# Altium PCB GND_REVB.PcbDoc
Units mm, origin at the board's own origin, x right, y up, seen from the top; angles counter-clockwise.
Board outline 100 x 100 mm, 2 copper layers (Top Layer, Bottom Layer); 25 components, 30 nets, 143 pads, 23 vias.
Unrouted connection lines stored in the file: 3.
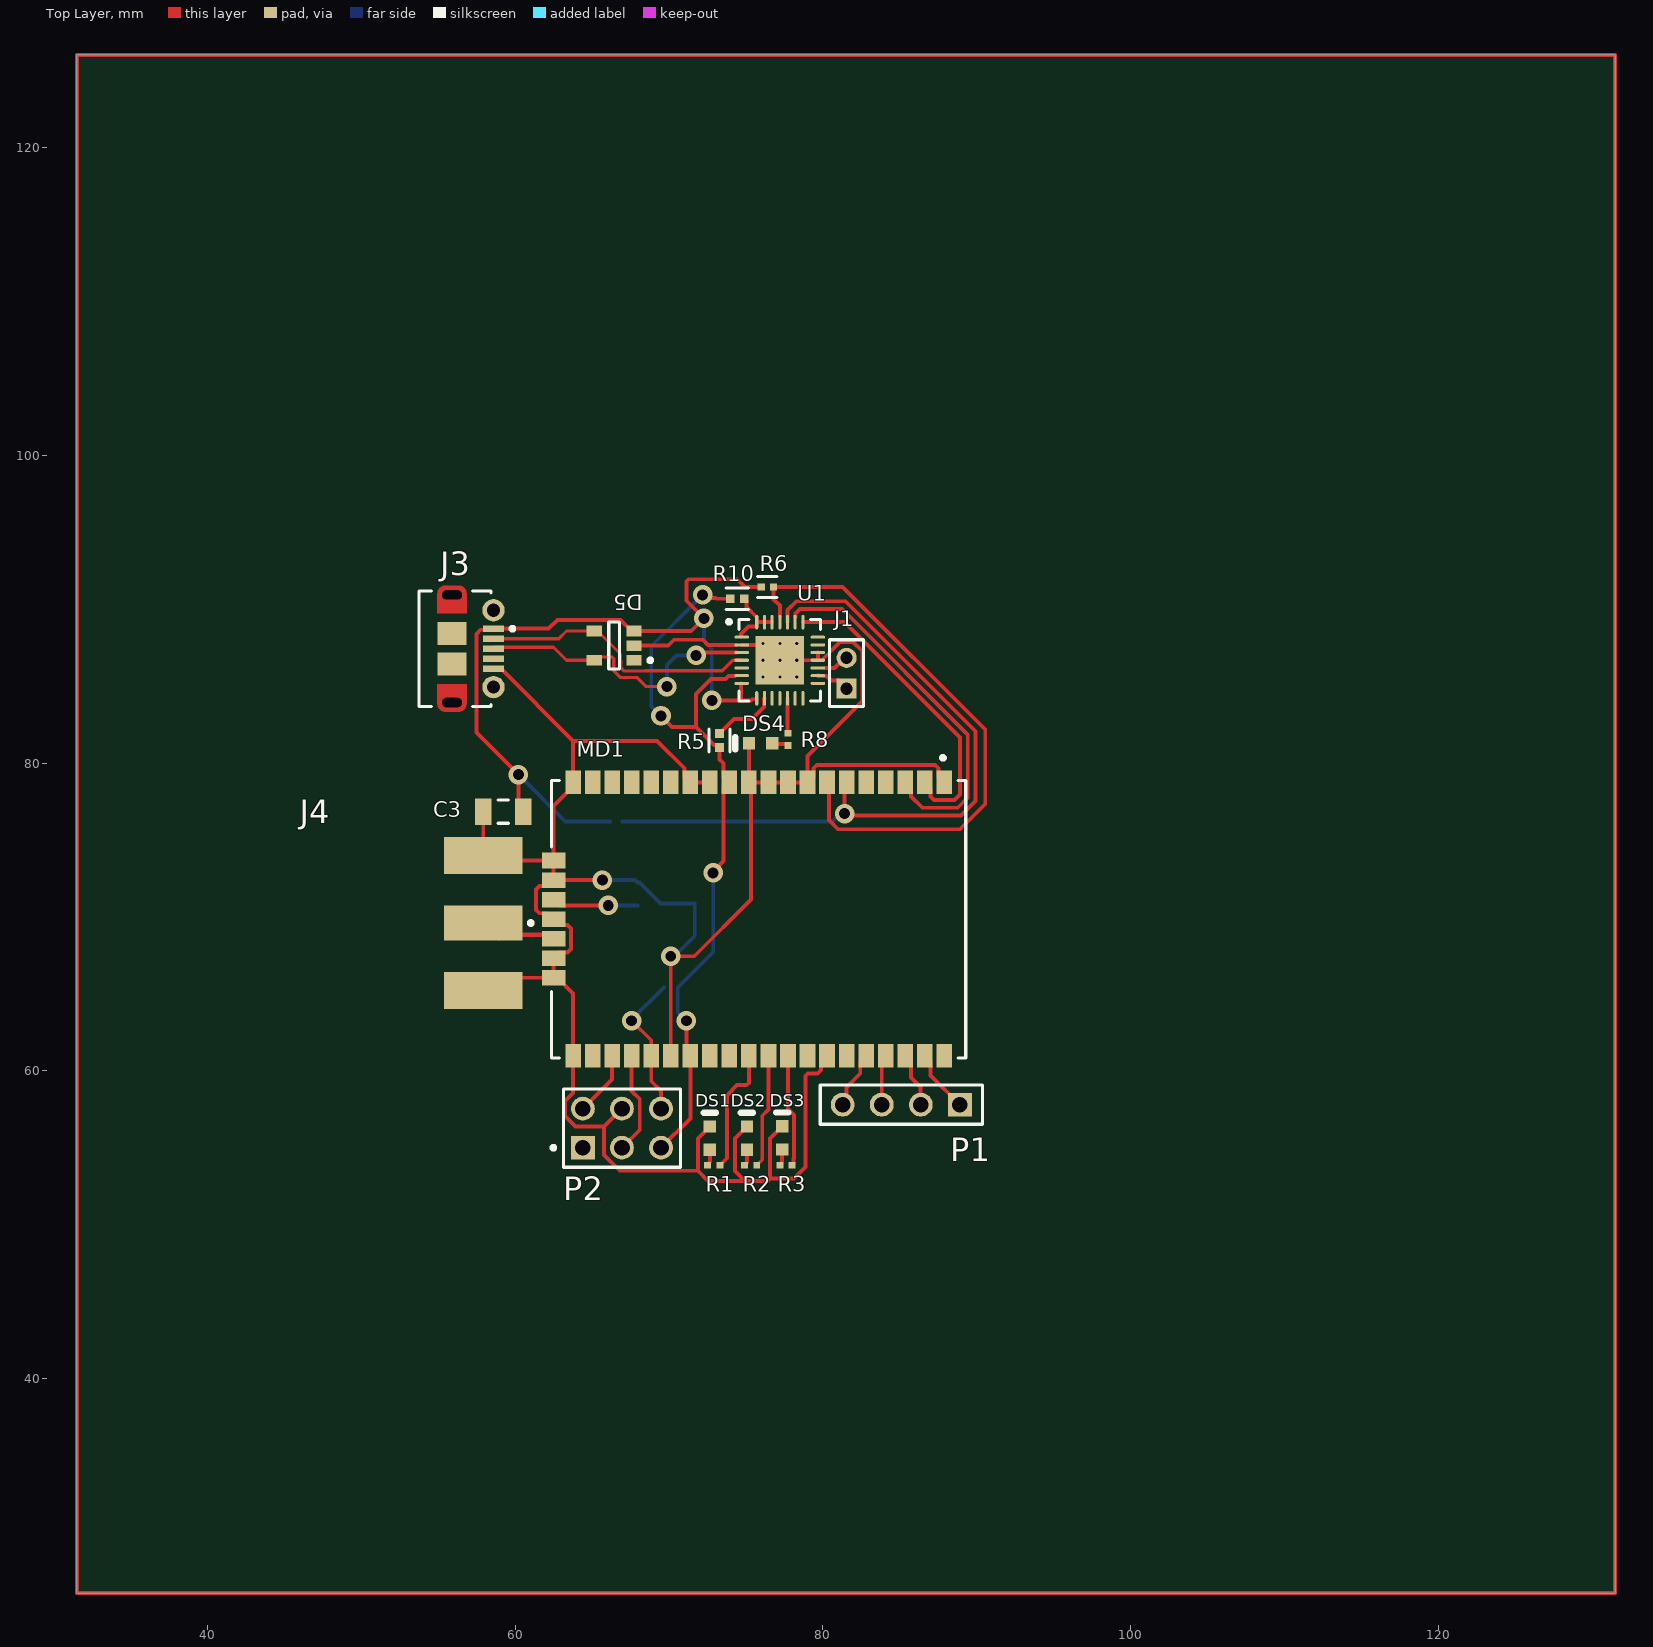
[diagram p0: Top Layer view]
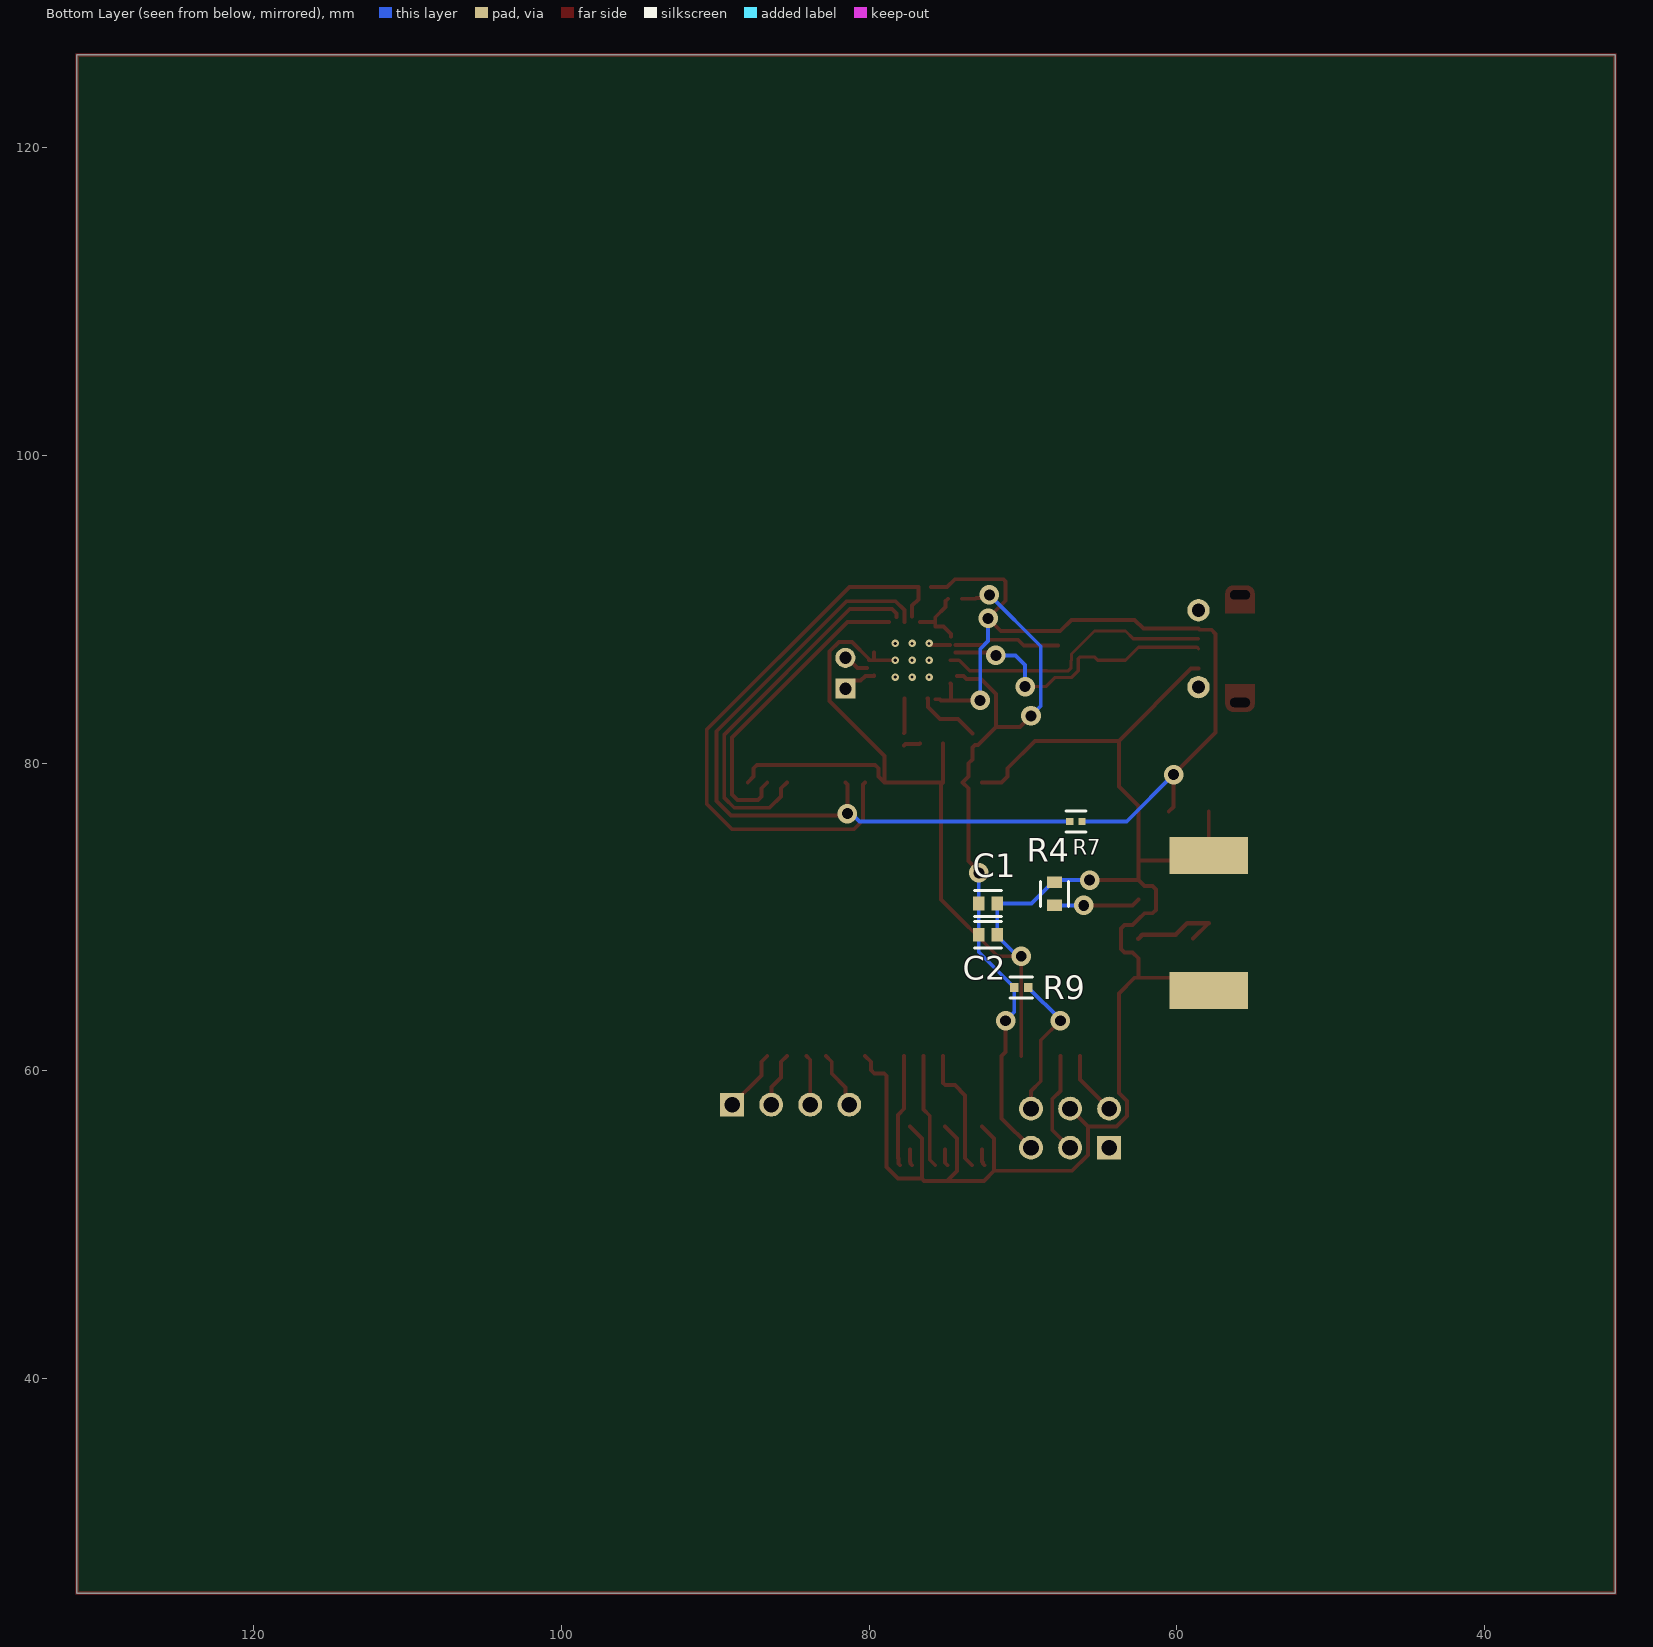
[diagram p1: Bottom Layer view, seen from below]
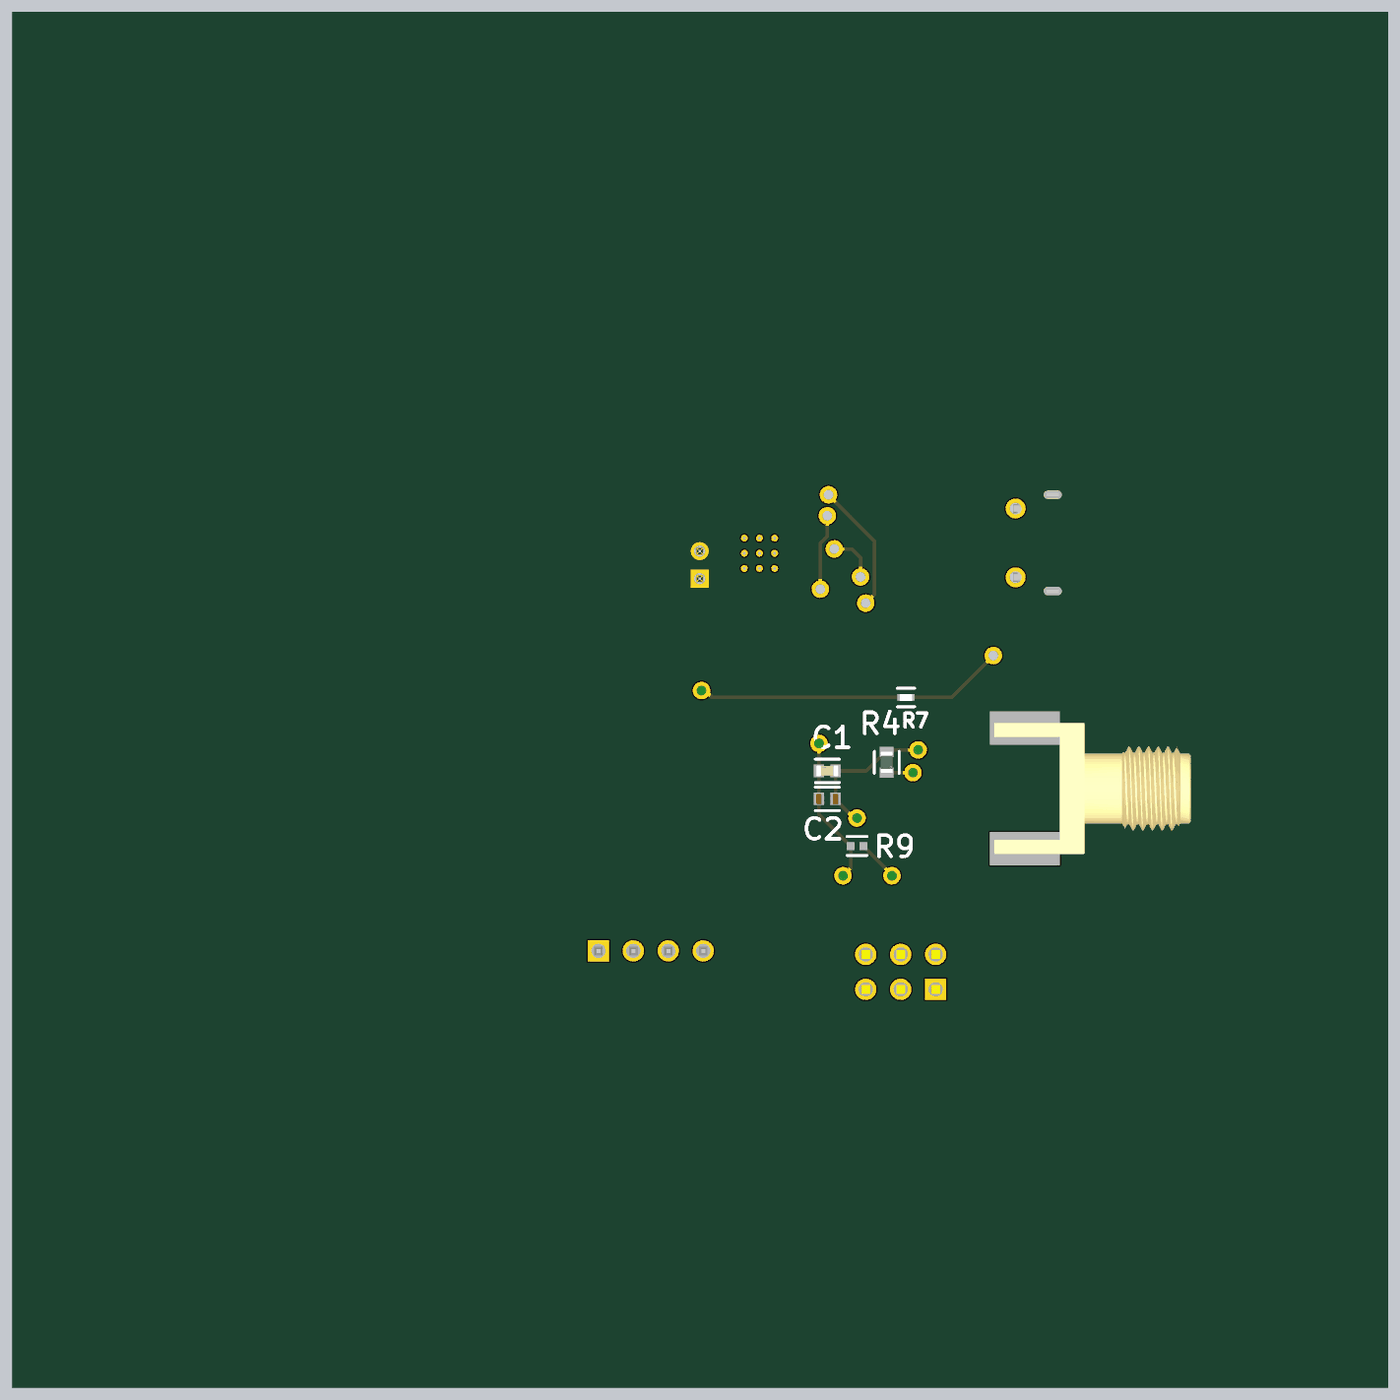
[diagram p2: 3D render of the assembled board from below, using the file's embedded part models]

## Layer stack, top to bottom
Top Solder: solder mask 0.0102, Solder Resist, Dk 3.5
Top Layer: signal copper 0.018
Dielectric 1: dielectric 0.32, FR-4, Dk 4.8
Bottom Layer: signal copper 0.018
Bottom Solder: solder mask 0.0102, Solder Resist, Dk 3.5

## Board outline
31.496,26.035 31.496,126.035 131.496,126.035 131.496,26.035

## Design rules (kind name [scope] priority, off if disabled: settings)
Clearance [All] p1: gap=0.254 ignorepadtopadclearanceinfootprint=TRUE except(0: Arc-Hole Track-Hole SMDPad-Hole THPad-Hole Via-Hole Fill-Hole Poly-Hole Region-Hole Text-Hole; 0.127: Arc-Arc Arc-Track Track-Track SMDPad-SMDPad THPad-THPad)
DiffPairsRouting [All] p1: maxlimit=0.254 minlimit=0.127 mostfreqgap=0.127 toplayer_minwidth=0.206 toplayer_maxwidth=0.206 toplayer_prefwidth=0.206 bottomlayer_minwidth=0.206 bottomlayer_maxwidth=0.206 bottomlayer_prefwidth=0.206 maxuncoupledlength=12.7
PlaneConnect [All] p1: pad.planeconnectstyle=Relief pad.reliefexpansion=0.508 pad.reliefentries=4 pad.reliefconductorwidth=0.254 pad.reliefairgap=0.254 via.planeconnectstyle=Direct via.reliefexpansion=0.508 via.reliefentries=4 via.reliefconductorwidth=0.254 via.reliefairgap=0.254
PolygonConnect [All] p1: connectstyle=Relief reliefconductorwidth=0.254 reliefentries=4 polygonreliefangle="90 Angle" airgapwidth=0.254
RoutingVias [All] p1: holewidth=0.254 width=0.445 viastyle="Through Hole" minholewidth=0.2 minwidth=0.4 maxholewidth=6.3 maxwidth=6.4
SolderMaskExpansion [All] p1: expansion=0.102 istentingtop=FALSE
Width [All] p1: maxlimit=2.5 minlimit=0.127 preferedwidth=0.293 minimp=50.000000 maximp=50.000000 favimp=50.000000
28 further rules are at their usual default settings.

## Classes and differential pairs
component class USBPort: C3 D5 J3
component class USB_UART: C1 C2 DS4 J1 R5 R6 R7 R8 R10 U1
component class RN2483: DS1 DS2 DS3 MD1 P1 P2 R1 R2 R3 R4 R9
component class RadioSignalBlocker: J4
differential pair USB_DATA: +D+ -D-
differential pair NewDifferentialPair1: +D+ -D-

## Components (designator, comment, footprint, x,y, rotation, side; value= is the part's Value field where it differs from the comment)
C1 "C0603C104K5RACTU" FP-C0603C-CF-MFG 72.263,70.866 r180 bottom value="0.10 μF"
C2 "C0603C475K9PACTU" FP-C0603-CG-MFG 72.263,68.834 r180 bottom value=4.7uF
C3 "C1206C105K5RACTU" CAPC3216X110X50LL20T25 59.212,76.835 r0 top
D5 "SP0504BAHTG" FP-SP0504BAHTG-MFG 66.421,87.63 r180 top value=30pF
DS1 "HSMY-C190" AVAG-HSMX-C190_V 72.644,55.614 r90 top
DS2 "HSMH-C190" AVAG-HSMX-C190_V 75.057,55.614 r90 top
DS3 "HSMG-C190" AVAG-HSMX-C190_V 77.343,55.626 r90 top
DS4 "HSMH-C190" AVAG-HSMX-C190_V 75.946,81.28 r180 top
J1 "M22-2510205" FP-M22-2510205-MFG 81.534,85.836 r90 top
J3 "105017-0001" USB-MICRO-B_V 57.23,87.432 r270 top
J4 "142-0701-801" CINC-142-0701-801_V 57.912,69.596 r180 top
MD1 "RN2483A-I/RM104" FP-RN2483A-I-RM104-MFG 75.819,69.85 r90 top
P1 "TSW-104-08-G-S" SMTC-TSW-104-08-X-S 88.9,57.785 r180 top
P2 "TSW-103-07-G-D" SMTC-TSW-103-07-G-D_V 66.929,56.261 r0 top
R1 "CRCW0402220KFKED" RESC1005X40X25LL05T05 72.898,53.848 r0 top
R2 "CRCW0402220KFKED" RESC1005X40X25LL05T05 75.292,53.848 r0 top
R3 "CRCW0402220KFKED" RESC1005X40X25LL05T05 77.597,53.848 r0 top
R4 "CRCW060350R0FKEA" FP-CRCW0603-e3-MFG 67.945,71.489 r270 bottom
R5 "CRCW040210K0FKED" FP-CRCW0402-e3-IPC_B 73.279,81.463 r270 top
R6 "CRCW0402100KFKED" FP-CRCW0402-e3-IPC_C 76.383,91.44 r180 top
R7 "CRCW0402100KFKED" FP-CRCW0402-e3-IPC_C 66.548,76.2 r180 bottom
R8 "CRCW0402220KFKED" RESC1005X40X25LL05T05 77.724,81.534 r90 top
R9 "CRCW040210K0FKED" FP-CRCW0402-e3-IPC_B 70.104,65.405 r0 bottom
R10 "CRCW040210K0FKED" FP-CRCW0402-e3-IPC_B 74.422,90.678 r0 top
U1 "CP2103-GM" SLAB-QFN-28-3125x3125TP_A_M 77.192,86.679 r0 top

## Footprints (in the part's own frame and the unit in brackets; to place one, negate y for a bottom-side part, rotate by r counter-clockwise, add the part's x,y. Pads: shape width x height; smd on the part's side, far side on the other; paste and mask are expansions set on the pad)
AVAG-HSMX-C190_V [mm] "SMD, 2-Leads, Body 1.6x0.8mm, Height 0.9mm"
  rect 0.8x0.8 smd: 1(-0.75,0) 2(0.75,0)
  silkscreen extent 1.65,-0.4 1.65,0.4, body extent -0.8,-0.4 0.8,0.4, height 0.9
CAPC3216X110X50LL20T25 [mm] "Chip Capacitor, 2-Leads, Body 3.20x1.60mm, IPC High Density"
  rect 1.1x1.7 smd: 1(-1.3,0) 2(1.3,0)
  silkscreen extent -0.35,-0.75 0.35,0.75, body extent -1.7,-0.9 1.7,0.9, height 1.1
CINC-142-0701-801_V [mil] "SMA Connector, 5-Leads, Body 14.275x9.525mm"
  rect 200x90 smd: 1(0,0)
  rect 200x95 smd: 2(0,172.5) 3(0,-172.5)
  rect 200x95 smd far side: 4(0,172.5)
  rect 200x95 smd far side mask+4: 5(0,-172.5)
  silkscreen extent -127,-5 -117,5, body extent -87,-187 475,188, height 171
FP-C0603-CG-MFG [mm]
  rect 0.75x0.9 smd paste+0 mask+0: 1(-0.6,0) 2(0.6,0)
  silkscreen extent -0.87,-0.85 0.87,0.85, body extent -0.8,-0.4 0.8,0.4, height 0.9
FP-C0603C-CF-MFG [mm]
  rect 0.75x0.9 smd paste+0 mask+0: 1(-0.6,0) 2(0.6,0)
  silkscreen extent -0.87,-0.85 0.88,0.85, body extent -0.8,-0.4 0.8,0.4, height 0.87
FP-CRCW0402-e3-IPC_B [mm]
  rect 0.568x0.572 smd paste+0 mask+0: 1(-0.452,0) 2(0.452,0)
  silkscreen extent -0.74,-0.69 0.74,0.69
FP-CRCW0402-e3-IPC_C [mm]
  rect 0.468x0.472 smd paste+0 mask+0: 1(-0.402,0) 2(0.402,0)
  silkscreen extent -0.64,-0.67 0.64,0.67, body extent -0.74,-0.38 0.74,0.38, height 0.25
FP-CRCW0603-e3-MFG [mm]
  rect 0.75x1 smd paste+0 mask+0: 1(-0.75,0) 2(0.75,0)
  silkscreen extent -0.8,-0.9 0.8,0.9, body extent -0.77,-0.43 0.77,0.43, height 0.5
FP-M22-2510205-MFG [mm]
  rect 1.3x1.3 hole 0.8 paste-1000 mask+0: 1(-1,0)
  round 1.3 hole 0.8 paste-1000 mask+0: 2(1,0)
  silkscreen extent -2.18,-1.1 2.18,1.1, body extent -2.27,-1.2 2.27,1.2, height 0.25
FP-RN2483A-I-RM104-MFG [mil]
  rect 60x40 smd paste+0 mask+0: 1(350,-475) 2(350,-425) 3(350,-375) 4(350,-325) 5(350,-275) 6(350,-225) 7(350,-175) 8(350,-125) 9(350,-75) 10(350,-25) 11(350,25) 12(350,75) 13(350,125) 14(350,175) 15(350,225) 16(350,275) 17(350,325) 18(350,375) 19(350,425) 20(350,475) 28(-350,475) 29(-350,425) 30(-350,375) 31(-350,325) 32(-350,275) 33(-350,225) 34(-350,175) 35(-350,125) 36(-350,75) 37(-350,25) 38(-350,-25) 39(-350,-75) 40(-350,-125) 41(-350,-175) 42(-350,-225) 43(-350,-275) 44(-350,-325) 45(-350,-375) 46(-350,-425) 47(-350,-475)
  rect 40x60 smd paste+0 mask+0: 21(150,525) 22(100,525) 23(50,525) 24(0,525) 25(-50,525) 26(-100,525) 27(-150,525)
  silkscreen extent -355,-530 418,530, body extent -384,-534 384,559, height 10
FP-SP0504BAHTG-MFG [mm]
  rect 0.99x0.69 smd paste+0 mask+0: 1(-1.295,0.95) 2(-1.295,0) 3(-1.295,-0.95) 4(1.295,-0.95) 5(1.295,0.95)
  silkscreen extent -2.48,-1.53 0.35,1.53, body extent -1.89,-1.63 1.89,1.63, height 0.25
RESC1005X40X25LL05T05 [mm] "Chip Resistor, 2-Leads, Body 1.00x0.50mm, IPC High Density"
  rect 0.45x0.45 smd: 1(-0.4,0) 2(0.4,0)
  body extent -0.53,-0.27 0.53,0.28, height 0.4
SLAB-QFN-28-3125x3125TP_A_M [mm] "QFN, 28-Leads, Body 5x5mm, Pitch 0.5mm, Thermal Pad 3.13x3.13mm, IPC Low Density"
  oval 0.95x0.2 smd: 1(-2.475,1.5) 2(-2.475,1) 3(-2.475,0.5) 4(-2.475,0) 5(-2.475,-0.5) 6(-2.475,-1) 7(-2.475,-1.5) 15(2.475,-1.5) 16(2.475,-1) 17(2.475,-0.5) 18(2.475,0) 19(2.475,0.5) 20(2.475,1) 21(2.475,1.5)
  oval 0.2x0.95 smd: 8(-1.5,-2.475) 9(-1,-2.475) 10(-0.5,-2.475) 11(0,-2.475) 12(0.5,-2.475) 13(1,-2.475) 14(1.5,-2.475) 22(1.5,2.475) 23(1,2.475) 24(0.5,2.475) 25(0,2.475) 26(-0.5,2.475) 27(-1,2.475) 28(-1.5,2.475)
  rect 3.13x3.13 smd: 29(0,0)
  silkscreen extent -3.42,-2.65 2.65,2.65, body extent -2.5,-2.5 2.5,2.5, height 1
SMTC-TSW-103-07-G-D_V [mm] "THD, 6-Leads, Body 7.62x5.08mm, Pitch 2.54mm"
  rect 1.55x1.55 hole 1.02: 1(-2.54,-1.27)
  round 1.55 hole 1.02: 2(-2.54,1.27) 3(0,-1.27) 4(0,1.27) 5(2.54,-1.27) 6(2.54,1.27)
  silkscreen extent -4.58,-2.54 3.81,2.54, body extent -3.81,-2.54 3.81,2.54, height 8.38
SMTC-TSW-104-08-X-S [mm] ".025 SQ Post Terminal Strip Assembly, 1x4 Pins, Vertical, 2.54mm Pitch, Male"
  rect 1.55x1.55 hole 1.02: 1(0,0)
  round 1.55 hole 1.02: 2(2.54,0) 3(5.08,0) 4(7.62,0)
  silkscreen extent -1.46,-1.27 9.08,1.27, body extent -1.27,-1.27 8.89,1.27, height 8.38
USB-MICRO-B_V [mm] "USB, MICRO B, Body 7.491x4.695 mm, Pitch 0.65 mm"
  rect 0.4x1.35 smd: 1(-1.3,1.35) 2(-0.65,1.35) 3(0,1.35) 4(0.65,1.35) 5(1.3,1.35)
  round 1.45 hole 0.85: 6(-2.5,1.35) 7(2.5,1.35)
  rrect50% 0x0 hole 0.6 slot 1.3 at 90 deg: 8(-3.5,-1.35) 11(3.5,-1.35)
  rect 1.5x1.9 smd: 9(-1,-1.35) 10(1,-1.35)
  Top Layer circle w0.5: c-3.6,-1.8 r0.25
  Top Layer circle w0.5: c-3.6,-0.9 r0.25
  Top Layer circle w0.5: c3.6,-1.8 r0.25
  Top Layer circle w0.5: c3.6,-0.9 r0.25
  Top Layer region: -3.6,-1.8 -3.6,-0.9 -4.1,-0.9 -4.1,-1.8
  Top Layer region: 3.6,-0.9 3.6,-1.8 4.1,-1.8 4.1,-0.9
  Top Layer region: 2.3,-0.4 2.3,-2.3 3.6,-2.3 3.6,-0.4
  Top Layer region: -2.3,-2.3 -2.3,-0.4 -3.6,-0.4 -3.6,-2.3
  silkscreen extent -3.75,-3.5 3.75,2.7, body extent -4.1,-3.9 4.1,1.5, height 2.67

## Part data
C1: library part CMP-2006-03061-2, "CAP CER 0.1UF 50V X7R 0603", Capacitance="0.10 μF", Manufacturer=KEMET, Package=C0603C-CF, Temperature="-55°C to +125°C", Temperature Characteristic=X7R, Temperature Coefficient=30ppm/°C, Temperature Range High=+125°C, Temperature Range Low=-55°C, Tolerance=0.1, Voltage Rating="50 V", Automotive=Yes, Automotive Grade="Grade 1", Category=Cap, ComponentLink2Description=Datasheet, ComponentLink2URL=https://api.kemet.com/component-edge/download/datasheet/C0603C100J5GACAUTO.pdf, Device Class L1="Passive Components", Device Class L2=Capacitors, Device Class L3="Ceramic Capacitors", Digikey Description="CAP CER 0.1UF 50V X7R 0603", Height=0.87mm, Lead Free=Yes, Manufacturer Part Number=C0603C104K5RACTU, Material=Ceramic, Octopart=https://octopart.com/c0603c104k5ractu-kemet-139244, RoHS=TRUE
C2: library part CMP-2006-02256-2, "CAP CER 4.7UF 6.3V X5R 0603", Capacitance=4.7uF, Manufacturer=Kemet, Package=C0603-CG, Temperature="-55°C to +85°C", Temperature Characteristic=X5R, Temperature Coefficient=15%, Temperature Range High=+85°C, Temperature Range Low=-55°C, Tolerance=10%, Voltage Rating=6.3V, Automotive=No, Category=Cap, ComponentLink2Description=Datasheet, ComponentLink2URL=https://content.kemet.com/datasheets/KEM_C1006_X5R_SMD.pdf, Device Class L1="Passive Components", Device Class L2=Capacitors, Device Class L3="Ceramic Capacitors", Digikey Description="CAP CER 4.7UF 6.3V X5R 0603", Height=0.9mm, Ipc Land Pattern Name=CAPC16080X80, Lead Free=Yes, Manufacturer Part Number=C0603C475K9PACTU, Material=Ceramic, Mouser Description="Multilayer Ceramic Capacitors MLCC - SMD/SMT 6.3volts 4.7uF X5R 10%", Octopart=https://octopart.com/c0603c475k9pactu-kemet-104242, RoHS=TRUE
C3: library part CMP-2000-06011-1, "Chip Capacitor, 1 uF, +/- 10%, 50 V, -55 to 125 degC, 1206 (3216 Metric), RoHS, Tape and Reel", Capacitance=1uF, Capacitance - nF=1000nF, Case Code - in=1206, Case Code - mm=3216, Case Height=1mm, Case Length=3.2mm, Case Width=1.6mm, Dielectric=X7R, Manufacturer=Kemet, Maximum Operating Temperature=+125C, Minimum Operating Temperature=-55C, Operating Temperature Range=-55Cto+125C, Package / Case=1206(3216metric), Package Description="2-Pin Surface Mount Device, Body 3.2 x 1.6 mm", Temperature Coefficient / Code=+/-15%, Tolerance=10%, Voltage Rating=50V, Brand=Kemet, Class=Class1, Datasheet URL=http://www.kemet.com/docfinder?Partnumber=C1206C105K5RACTU, Datasheet Version=02/2016, Dimensions=1.6mmWx3.2mmLx1mmH, Factory Pack Quantity=2500, Manufacturer URL=http://www.kemet.com/, Mounting Technology=SurfaceMount, Package Reference=1206, Packaging=Reel, Product=GeneralTypeMLCCs, Product Category=MultilayerCeramicCapacitorsMLCC-SMD/SMT, RoHS=Details, Series=C1206C, Termination Style=SMD/SMT, Type=SMDMLCCX7R6.3-250VDCCommericalGrade, Voltage Rating DC=50V
D5: library part CMP-08607-000010-1, "TVS DIODE 5.5V 8.5V SOT23-5", Capacitance=30pF, Clamping Voltage=8.5V, Manufacturer=Littelfuse, Reverse Standoff Voltage=5.5V, Temperature="-40°C to +125°C", Temperature Range High=+125°C, Temperature Range Low=-40°C, Automotive=No, Category=Diode, ComponentLink2Description=Datasheet, ComponentLink2URL=https://www.littelfuse.com/~/media/electronics/datasheets/tvs_diode_arrays/littelfuse_tvs_diode_array_sp05_datasheet.pdf.pdf, Device Class L1="Circuit Protection", Device Class L2="TVS Diodes", Device Class L3=unset, Digikey Description="TVS DIODE 5.5V 8.5V SOT23-5", Direction=Unidirectional, Height=1.45mm, Lead Free=Yes, Manufacturer Part Number=SP0504BAHTG, Mouser Description="TVS Diodes / ESD Suppressors SP0504BAHTG", Number Of Channels=4, Octopart=https://octopart.com/sp0504bahtg-littelfuse-587259, Package=SP0504BAHTG, RoHS=TRUE, Standoff Height=0mm
DS1: library part CMP-1744-00003-1, "LED Uni-Color Yellow, 65 mW, 20 mA, -40 to 85 degC, 2-Pin SMD, RoHS, Tape and Reel", Case Code (Imperial)=0603, Case Code (Metric)=1608, Max Operating Temperature="155 degC", Min Operating Temperature="-55 degC", Package Quantity=5000, Power Rating="100 mW", Resistance="390 Ohm", Tolerance=1%, Voltage Rating="50 V", Case\Package=0603, ComponentLink1Description="Manufacturer URL", ComponentLink1URL=http://www.avagotech.com/, ComponentLink2Description=Datasheet, ComponentLink2URL=http://docs.avagotech.com/docs/AV02-0551EN, ComponentLink3Description="Package Specification", ComponentLink3URL=http://www.fairchildsemi.com/dwg/MA/MA03D.pdf, DatasheetVersion=Mar-12, Height="0.45 mm", Length="1.6 mm", Mount="Surface Mount", PackageDescription="2-Pin Surface Mount Device, Body 1.6 x 0.8 mm, Height 0.9 mm", PackageReference=HSMX-C190, Packaging="Tape and Reel", Pins=2, REACH SVHC="No SVHC", RoHSCompliant=true, Voltage Rating (DC)="50 V", Width="0.8 mm"
DS2 DS4: library part CMP-1744-00004-1, "LED Uni-Color Red, 65 mW, 20 mA, -40 to 85 degC, 2-Pin SMD, RoHS, Tape and Reel", Current Rating="1 A", Max Operating Temperature="85 degC", Min Operating Temperature="-30 degC", Package Quantity=2000, ComponentLink1Description="Manufacturer URL", ComponentLink1URL=http://www.avagotech.com/, ComponentLink2Description=Datasheet, ComponentLink2URL=http://docs.avagotech.com/docs/AV02-0551EN, ComponentLink3Description="Package Specification", ComponentLink3URL=http://www.fairchildsemi.com/dwg/MA/MA03D.pdf, Connector Type=USB, Contact Material=Copper, Contact Plating=Gold, DatasheetVersion=Mar-12, Gender=Male, Height="2.8 mm", Lead Pitch="0.65 mm", Length="7.5 mm", Mount="Surface Mount", PackageDescription="2-Pin Surface Mount Device, Body 1.6 x 0.8 mm, Height 0.9 mm", PackageReference=HSMX-C190, Packaging="Tape and Reel", Pins=5, REACH SVHC="No SVHC", RoHSCompliant=true, Width="5.6 mm"
DS3: library part CMP-1744-00002-1, "Chip LED, Green, 2.2 V, -40 to 85 degC, 2-Pin SMD, RoHS, Tape and Reel", Case\Package=SOIC, Clock Frequency="100 KHz", Frequency="400 KHz", Max Operating Temperature="85 degC", Max Supply Voltage="5.5 V", Min Operating Temperature="-40 degC", Min Supply Voltage="1.7 V", Nominal Supply Current="2 mA", Package Quantity=3000, Access Time="3500 ns", ComponentLink1Description="Manufacturer URL", ComponentLink1URL=http://www.avagotech.com/, ComponentLink2Description=Datasheet, ComponentLink2URL=http://docs.avagotech.com/docs/AV02-0551EN, ComponentLink3Description="Package Specification", ComponentLink3URL=http://www.fairchildsemi.com/dwg/MA/MA03D.pdf, DatasheetVersion=Mar-12, Density="32 kb", Height="1.5 mm", Interface=Serial, Length="5 mm", Max Clock Frequency="100 KHz", Mount="Surface Mount", PackageDescription="2-Pin Surface Mount Device, Body 1.6 x 0.8 mm, Height 0.9 mm", PackageReference=HSMX-C190, Packaging="Tape and Reel", Pins=8, Radiation Hardening=No, REACH SVHC="No SVHC", RoHSCompliant=true, Width="4 mm"
J1: library part CMP-15831-000005-1, "CONN HEADER VERT 2POS 2MM", Current Rating=2A, Manufacturer=Harwin, Package=0, Temperature="-40°C to +105°C", Temperature Range High=+105°C, Temperature Range Low=-40°C, Automotive=No, Category=Conn, ComponentLink2Description=Datasheet, ComponentLink2URL=https://cdn.harwin.com/pdfs/C018XX_M22_Series_Connectors.pdf, Conn Gender=Male, Conn Orientation=Vertical, Contact Material=Gold,Nickel, Device Class L1=Connectors, Device Class L2="Headers and Wire Housings", Device Class L3=unset, Digikey Description="CONN HEADER VERT 2POS 2MM", Footprint Url=https://cdn.harwin.com/pdfs/M22-251.pdf, Height=5.45mm, Lead Free=Yes, Manufacturer Part Number=M22-2510205, Mouser Description="Headers & Wire Housings 2 PIN SIL VERTICAL GOLD PIN HEADER", Number Of Contacts=2, Number Of Rows=1, Octopart=https://octopart.com/m22-2510205-harwin-2538221, Pitch=2mm, RoHS=TRUE
J3: library part CMP-2000-05827-1, "Micro-USB B Receptacle, Right Angle, Bottom Mount, Surface Mount, with Solder Tabs, -30 to 85 degC, 5-Pin USB, RoHS, Tape and Reel", Manufacturer=Molex, Package Description="5-Leads USB, Micro B, Body 7.5 x 5 mm, Pitch 0.65 mm", Package Reference=MICRO-B, Package Version="Rev. F, 12/2012", Standard Package=1, Voltage - Max=30V, 3D Model=105017-0001.stp, Catalog Drawings=1050170001, Category=Connectors,Interconnects, Circuits=5, Connector Type=USB-microB, Datasheet URL=http://www.molex.com/elqNow/elqRedir.htm?ref=http://www.molex.com/webdocs/datasheets/pdf/en-us/1050170001_IO_CONNECTORS.pdf, Datasheet Version=03/2016, Family=USB,DVI,HDMIConnectors, Featured Product=Micro-USBConnectorsUSBConnectors, Features=Shielded,SolderRetention, Gender=Receptacle, Ingress Protection=-, Manufacturer URL=http://www.molex.com/, Mating Products=WM17145-ND-CABLEMICROUSBBTOSTDA1.0MWM17147-ND-CABLEMICROUSBBTOSTDA2.0MWM17146-ND-CABLEMICROUSBBTOSTDA1.5M, Mounting Technology=SurfaceMount, Mounting Type=BoardCutout,SurfaceMount,RightAngle, Number Of Contacts=5, Online Catalog=Molex-MicroUSB, Other Names=WM1399DKR, Package URL=http://www.molex.com/pdm_docs/sd/1050170001_sd.pdf, Packaging=Digi-Reel®, PCN Assembly/Origin=ResinSupplier21/Oct/2015, RoHS Information=1050170001CertofCompliance, Series=-, Specifications=-
J4: library part CMP-2000-05490-1, "SMA End Launch Jack Receptacle, 50 Ohm, 0 to 18 GHz, -65 to 165 degC, 5-Pin SMD, RoHS, Bulk", Manufacturer=EmersonConnectivitySolutions, Maximum Frequency=18GHz, Operating Temperature Range=-65Cto+165C, Package Description="5-Pin Surface Mount Device, Body 14.275 x 9.525 mm", Body Material=Brass, Body Style=Straight, Brand=Johnson/EmersonConnectivitySolutions, Connector Type=JackPCB, Contact Plating=Gold, Datasheet URL=https://belfuse.com/resources/Johnson/productinformation/pi-142-0701-801.pdf, Datasheet Version=12/2014, Factory Pack Quantity=5, Gender=Jack(Female), Impedance=50Ohms, Manufacturer URL=http://www.cinch.com/, Mounting Technology=SurfaceMount, Orientation=Straight, Package Reference=142-0701-801, Package URL=https://belfuse.com/resources/Johnson/drawings/dr-1420701801.pdf, Product=Connectors, Product Category=RFConnectors/CoaxialConnectors, RF Series=SMA, RoHS=Details, Series=SMA, Termination Style=Solder
MD1: library part CMP-06331-000004-1, Manufacturer=Microchip, Max Frequency=870MHz, Max Supply Voltage=3.6V, Min Supply Voltage=2.1V, Temperature="-40°C to +85°C", Temperature Range High=+85°C, Temperature Range Low=-40°C, Transmitting Current=44.5mA, Automotive=No, Bandwidth=1.74MHz, Category=UNK, ComponentLink2Description=Datasheet, ComponentLink2URL=http://ww1.microchip.com/downloads/en/DeviceDoc/RN2483-Low-Power-Long-Range-LoRa-Technology-Transceiver-Module-Data-Sheet-DS50002346D.pdf, Data Rate=300kbits/s, Device Class L1="Integrated Circuits (ICs)", Device Class L2="RF Semiconductors and Devices", Device Class L3=Transceivers, Digikey Description=RN2483A-I/RM104, Height=3.467mm, Interface=I2C,SPI,UART, Lead Free=Yes, Manufacturer Part Number=RN2483A-I/RM104, Mouser Description="RF Transceiver Module FSK/GFSK/LoRa 434.79MHz/870MHz 3.3V SMD Tray", Number Of Adc Channels=13, Number Of Gpio=14, Octopart=https://octopart.com/rn2483a-i%2Frm104-microchip-90584481, Package=RN2483A-I/RM104, RoHS=TRUE, Sensitivity=-146dBm
P1: library part CMP-1024-00357-1, "0.025\" SQ Post Header, Through-hole, Vertical, -55 to 125 degC, 2.54 mm Pitch, 4-Pin, Male, RoHS", Manufacturer=Samtec, Temperature Range="-55 to 125 degC", ComponentLink1Description="Manufacturer URL", ComponentLink1URL=http://www.samtec.com, ComponentLink2Description=Datasheet, ComponentLink2URL=http://www.samtec.com/documents/webfiles/pdf/TSW_TH.PDF, ComponentLink3Description="Package Specification", ComponentLink3URL=http://www.samtec.com/documents/webfiles/cpdf/TSW-XXX-XX-XXX-X-XX-XXX-MKT.pdf, DatasheetVersion=F-214, Mounting Technology=Through-hole, Orientation=Vertical, PackageDescription=".025[0.64] SQ. Post Terminal Strip Assembly", PackageReference=TSW-104-08-X-S, PackageVersion="DM, 8/1988", PartNumber=TSW-104-08-G-S, Pitch="2.54 mm", RoHS=True
P2: library part CMP-2000-07329-1, "Through Hole Header, Pitch 2.54 mm, 2 x 3 Position, Height 8.58 mm, Tail Length 2.54 mm, -55 to 125 degC, RoHS, Bulk", Color=Black, Manufacturer=Samtec-Inc., Package Description="Through Hole Header, Pitch 2.54 mm, 2 x 3 Position, Height 8.58 mm, Tail Length 2.54 mm", Category=Connectors,Interconnects, Connector Type=Header,Unshrouded, Contact Finish=Gold, Contact Finish Thickness=10µin(0.25µm), Contact Mating Length="0.230\"(5.84mm)", Contact Type=MalePin, Datasheet URL=http://suddendocs.samtec.com/catalog_english/tsw_th.pdf, Datasheet Version=12/2015, Family=RectangularConnectors-Headers,MalePins, Fastening Type=-, Features=-, Manufacturer URL=http://www.samtec.com/, Mounting Technology=ThroughHole, Mounting Type=ThroughHole, Number of Positions=6, Number of Positions Loaded=All, Number Of Rows=2, Package Reference=TSW-103-07-G-D, Package URL=http://suddendocs.samtec.com/prints/tsw-xxx-xx-xxx-x-xx-xxx-mkt.pdf, Packaging=Bulk, Pitch="0.100\"(2.54mm)", Row Spacing="0.100\"(2.54mm)", Series=TSW, Termination=Solder
R1 R2 R3 R8: library part CMP-2002-08370-1, Manufacturer="Vishay Dale", Part Number=CRCW0402220KFKED
R4: library part CMP-2000-03436-2, "RES Thick Film, 50Ω, 1%, 0.1W, 100ppm/°C, 0603", Case Code (Imperial)=0603, Case Code (Metric)=1608, Max Operating Temperature=155°C, Min Operating Temperature=-55°C, Package Quantity=5000, Power Rating=100mW, Resistance=50R, Temperature Coefficient=100ppm/°C, Tolerance=1%, Voltage Rating=75V, Case/Package=0603, Composition="Thick Film", Contact Plating=Tin, Depth=0.85mm, Height=0.45mm, Lead Free="Lead Free", Length=1.55mm, Military Standard=Not, Mount="Surface Mount", Number of Pins=2, Packaging="Tape and Reel", Radiation Hardening=No, REACH SVHC="No SVHC", Termination=SMD/SMT, Voltage Rating (DC)=75V, Weight=7.1E-05oz, Width=0.85mm
R5 R9 R10: library part CMP-2002-08135-2, "RES SMD 10K OHM 1% 1/16W 0402", Case Code (Imperial)=0402, Case Code (Metric)=1005, Max Operating Temperature=155°C, Max Power Dissipation=63mW, Min Operating Temperature=-55°C, Package Quantity=10, Resistance=10kR, Temperature Coefficient=100ppm/°C, Tolerance=1%, Voltage Rating=50V, Case/Package=0402, Composition="Thick Film", Contact Plating=Tin, Depth=0.5mm, Features="Automotive AEC-Q200", Height=0.35mm, Lead Free="Lead Free", Length=1mm, Military Standard=Not, Mount="Surface Mount", Number of Pins=2, Number of Terminations=2, Packaging="Tape and Reel", Power Rating=63mW, Radiation Hardening=No, Termination=SMD/SMT, Voltage Rating (DC)=50V, Weight=2.3E-05oz, Width=0.02inch
R6 R7: library part CMP-2002-08123-3, "RES Thick Film, 100kΩ, 1%, 0.063W, 100ppm/°C, 0402", Case Code (Imperial)=0402, Case Code (Metric)=1005, Max Operating Temperature=155°C, Max Power Dissipation=63mW, Min Operating Temperature=-55°C, Package Quantity=10000, Resistance=100kR, Temperature Coefficient=100ppm/°C, Tolerance=1%, Voltage Rating=50V, Case/Package=0402, Composition="Thick Film", Contact Plating=Tin, Depth=0.5mm, Features="Automotive AEC-Q200", Height=0.35mm, Lead Free="Lead Free", Length=1mm, Military Standard=Not, Mount="Surface Mount", Number of Pins=2, Number of Terminations=2, Packaging="Tape and Reel", Power Rating=63mW, Radiation Hardening=No, Termination=SMD/SMT, Voltage Rating (DC)=50V, Weight=2.3E-05oz, Width=0.02inch
U1: library part CMP-0511-00006-1, "Single-Chip USB to UART Bridge, 1024 Bytes EEPROM, -40 to 85 degC, 28-pin QFN, Tube", Manufacturer="Silicon Labs", ComponentLink1Description="Manufacturer URL", ComponentLink1URL=http://www.silabs.com/, ComponentLink2Description=Datasheet, ComponentLink2URL=http://www.silabs.com/Support%20Documents/TechnicalDocs/CP2103.pdf, ComponentLink3Description="Package Specification", ComponentLink3URL=http://www.silabs.com/Support%20Documents/TechnicalDocs/C8051F35x.pdf, DatasheetVersion="Rev. 1.0", EEPROM="1024 Bytes", Internal Oscillator=TRUE, Mounting Technology="Surface Mount", PackageDescription="28-Pin Quad-Flat No-Leads Package, Body 5 x 5 mm, Pitch 0.5 mm", PackageReference=QFN-28, PartNumber=CP2103-GM, Sub-Family="USB Bridges"

## Via types
v1: diameter 1.27, hole 0.711, Top Layer to Bottom Layer, 14 vias
v2: diameter 0.5, hole 0.2, Top Layer to Bottom Layer, 9 vias

## Nets (pads, with @x,y where several pads share a name; then routed paths per layer and width w, separated by ;. In a path a pad name is that pad's centre, name@x,y a point inside that pad or via, vN(x,y) a via of type N, cw(c..) or ccw(c..) an arc to the next point about the centre after c; other vN are vias at no path point)
3.3V: C1.1 C2.1 MD1.12 MD1.34 P2.5 R5.2 R9.2 R10.1 U1.6 | length 50.1
  Top Layer w0.254: P2.5 71.374,56.896 MD1.34 71.12,61.214 v1(71.12,63.246) ; v1(69.469,83.058) 70.197,82.33 71.755,82.33 ; v1(72.176,90.932) 72.37,90.738 73.014,90.738 73.074,90.678 R10.1 ; v1(72.863,72.863) 72.863,72.96 73.533,73.63 73.533,78.359 MD1.12 73.533,79.121 73.533,79.987 73.279,80.241 R5.2 73.122,81.168 72.917,81.168 71.755,82.33 ; U1.6@74.295,85.66 73.849,85.66 73.66,85.471 72.731,85.471 71.755,84.495 71.755,82.33
  Bottom Layer w0.254: v1(69.469,83.058) 68.834,83.693 68.834,87.59 v1(72.176,90.932) ; v1(71.12,63.246) 70.556,63.81 R9.2 70.556,65.407 72.863,67.714 C2.1 C1.1 v1(72.863,72.863) v1@72.898,72.898
5V: C3.2 D5.3 J3.1 R6.2 R7.2 U1.7 U1.8 | length 53.4
  Top Layer w0.254: C3.2 60.198,77.149 v1(60.198,79.248) 57.474,81.972 57.474,88.39 57.747,88.663 58.511,88.663 J3.1 62.166,88.732 62.74,89.306 66.84,89.306 67.566,88.58 71.435,88.58 v1(72.263,89.408) 71.12,90.551 71.12,91.799 71.269,91.948 74.422,91.948 74.93,91.44 R6.2 ; v1(72.771,84.074) 74.676,84.074 ; U1.7 74.703,85.179 74.676,85.152 74.676,84.074 ; U1.8@75.665,84.146 75.383,84.146 75.311,84.074 74.676,84.074
  Bottom Layer w0.254: v1(60.198,79.248) 63.246,76.2 R7.2 ; v1(72.263,89.408) 72.263,87.924 72.771,87.416 v1(72.771,84.074)
D+: D5.5 J3.3 U1.3 | length 19.3
  Top Layer w0.206: J3.3 58.673,87.525 62.48,87.525 63.325,86.68 D5.5 65.346,86.9 66.279,86.9 66.4,86.779 66.4,86 66.85,85.55 67.921,85.55 68.508,84.963 v1(69.85,84.963)
  Top Layer w0.254: v1(71.755,86.995) 71.931,87.171 U1.3@74.369,87.171
  Bottom Layer w0.254: v1(69.85,84.963) 69.85,86.36 70.485,86.995 v1(71.755,86.995)
D-: D5.4 J3.2 U1.4 | length 18.2
  Top Layer w0.206: J3.2 62.827,88.082 63.325,88.58 D5.4 65.344,88.58 66.84,87.084 66.84,86.671 66.851,86.66 ; 66.853,86.66 66.864,86.649 66.864,86.187 67.076,85.975 68.4,85.975 68.428,86.003 73.463,86.003 74.139,86.679 U1.4
GND: C1.2 C2.2 C3.1 D5.2 DS1.2 DS2.2 DS3.2 DS4.2 J3.5 J4.2 J4.3 J4.4 J4.5 MD1.1 MD1.8 MD1.9 MD1.10 MD1.11 MD1.13 MD1.14 MD1.20 MD1.21 MD1.22 MD1.24 MD1.26 MD1.27 MD1.28 MD1.33 MD1.41 MD1.47 P2.4 R4.1 U1.2 U1.18 U1.19 U1.29 | length 174.2
  Top Layer w0.254: J4.2 58.737,66.04 MD1.27 ; C3.1 J4.3 58.229,73.66 MD1.21 ; J3.5 59.055,86.132 63.754,81.433 ; v1(65.659,72.39) MD1.22 ; P2.4 65.773,56.375 ; D5.2 69.939,87.63 70.32,88.011 72.188,88.011 72.52,87.679 U1.2@74.369,87.679 ; MD1.33 v1(70.104,67.437) 71.628,67.437 75.311,71.12 75.311,78.613 MD1.11 ; DS1.2 71.863,55.583 71.863,53.494 ; MD1.13 MD1.14 70.993,79.121 70.993,79.66 69.22,81.433 63.754,81.433 ; U1.2 75.992,87.679 v2(76.092,87.779) ; DS2.2 74.276,55.583 74.276,53.475 74.919,52.832 ; DS4.2 75.196,78.752 MD1.11 ; DS3.2 76.562,55.595 76.562,52.981 ; v2(78.292,86.679) U1.18 ; U1.19 U1.18 ; MD1.41 79.883,60.579 79.883,60.04 79.66,59.817 79.016,59.817 78.867,59.668 78.867,53.729 78.119,52.981 76.562,52.981 ; MD1.1 87.503,79.121 87.503,79.66 87.28,79.883 79.598,79.883 79.375,79.66 79.375,79.121 MD1.8 ; MD1.27 62.738,66.04 63.754,65.024 MD1.28 63.754,58.547 63.233,58.026 63.233,57.052 63.91,56.375 65.773,56.375 ; MD1.27 MD1.26 62.865,67.691 63.404,67.691 63.627,67.914 63.627,69.246 63.404,69.469 62.865,69.469 MD1.24 62.103,70.231 61.564,70.231 61.341,70.454 61.341,71.786 61.564,72.009 62.103,72.009 MD1.22 ; MD1.22 MD1.21 ; MD1.21 62.484,77.216 63.754,78.486 MD1.20 63.754,81.433 ; 65.773,56.375 65.773,54.512 66.791,53.494 71.863,53.494 ; 71.863,53.494 72.525,52.832 74.919,52.832 ; 74.919,52.832 76.413,52.832 76.562,52.981 ; MD1.11 MD1.10 MD1.9 MD1.8 ; MD1.8 78.994,80.457 82.565,84.028 82.565,87.263 81.961,87.867 81.107,87.867 80.015,86.775 80.015,86.706 79.988,86.679 U1.18
  Bottom Layer w0.254: v1(65.659,72.39) 67.794,72.39 R4.1 68.07,72.239 69.443,70.866 C1.2 C2.2 71.663,68.759 70.341,67.437 v1(70.104,67.437)
  other v2: 76.092,85.579 77.192,85.579 78.292,85.579 76.092,86.679 77.192,86.679 77.192,87.779 78.292,87.779
"GPIO 2": J1.1 U1.16 | length 2.2
  Top Layer w0.254: U1.16 79.686,85.66 80.241,85.66 80.542,85.359 81.011,85.359 J1.1
"GPIO 3": J1.2 U1.17 | length 1.7
  Top Layer w0.254: U1.17@80.137,86.168 80.744,86.168 81.412,86.836 J1.2
"GPIO 6": MD1.43 P1.4 | length 3.8
  Top Layer w0.254: P1.4 81.528,58.033 81.528,58.907 82.423,59.802 82.423,60.579 MD1.43
"GPIO 7": MD1.44 P1.3 | length 3.3
  Top Layer w0.254: P1.3 83.82,60.706 MD1.44
"GPIO 8": MD1.45 P1.2 | length 3.6
  Top Layer w0.254: MD1.45 85.725,60.579 85.725,59.548 86.332,58.941 86.332,57.813 P1.2
"GPIO 9": MD1.46 P1.1 | length 4.1
  Top Layer w0.254: MD1.46 86.995,60.579 86.995,59.69 P1.1
NetDS1_1: DS1.1 R1.1 | length 1.1
  Top Layer w0.254: R1.1 72.596,53.946 72.596,54.047 72.644,54.095 DS1.1
NetDS2_1: DS2.1 R2.1 | length 1.1
  Top Layer w0.254: R2.1 75.057,54.013 DS2.1
NetDS3_1: DS3.1 R3.1 | length 1.1
  Top Layer w0.254: R3.1 77.295,53.946 77.295,54.047 77.343,54.095 DS3.1
NetDS4_1: DS4.1 R8.1 | length 1.1
  Top Layer w0.254: DS4.1 76.744,81.232 77.626,81.232 R8.1
NetMD1_23: MD1.23 R4.2 | length 5.6
  Top Layer w0.254: MD1.23 62.865,70.739 v1(66.04,70.739)
  Bottom Layer w0.254: v1(66.04,70.739) R4.2
NetMD1_37: MD1.37 R1.2 | length 8.3
  Top Layer w0.254: R1.2 73.755,54.305 73.755,58.388 74.422,59.055 75.035,59.055 75.184,59.204 MD1.37
NetMD1_38: MD1.38 R2.2 | length 7.4
  Top Layer w0.254: R2.2 76.054,54.21 76.054,57.067 76.454,57.468 MD1.38
NetMD1_39: MD1.39 R3.2 | length 7.3
  Top Layer w0.254: MD1.39 77.724,57.522 78.124,57.122 78.124,54.318 78.095,54.289 78.095,53.946 R3.2
NetR5_1: R5.1 U1.9 | length 4.2
  Top Layer w0.254: R5.1 73.281,81.915 74.217,82.851 75.394,82.851 76.173,83.63 76.173,84.185 U1.9
NetR8_2: R8.2 U1.12 | length 2.3
  Top Layer w0.254: U1.12 77.692,81.966 R8.2
NetR10_2: R10.2 U1.1 U1.26 U1.27 U1.28 | length 4.5
  Top Layer w0.254: U1.1@74.676,88.206 74.676,88.392 75.157,88.873 75.665,88.873 75.692,88.9 U1.28 ; R10.2 75.031,90.521 75.031,90.136 75.692,89.475 U1.28 ; U1.26 U1.27 U1.28
PGC_INT: MD1.30 P2.2 | length 4.2
  Top Layer w0.254: P2.2 66.294,59.436 MD1.30
PGD_INT: MD1.31 P2.3 | length 6.7
  Top Layer w0.254: P2.3 68.085,56.147 68.085,58.151 67.564,58.672 MD1.31
RADIO_CTS: MD1.3 U1.23 | length 24.4
  Top Layer w0.254: U1.23@78.211,89.502 78.211,89.728 78.493,90.01 81.255,90.01 89.408,81.857 89.408,77.737 88.76,77.089 86.456,77.089 85.725,77.82 85.725,78.359 MD1.3
RADIO_RTS: MD1.2 U1.22 | length 20.2
  Top Layer w0.254: U1.22 81.392,89.154 88.9,81.646 88.9,77.947 88.55,77.597 87.218,77.597 86.995,77.82 86.995,78.359 MD1.2
RADIO_RX: MD1.7 R6.1 U1.25 | length 38.1
  Top Layer w0.254: U1.25@77.195,89.535 77.195,90.228 76.785,90.638 R6.1 81.28,91.44 90.551,82.169 90.551,77.343 88.9,75.692 80.986,75.692 80.391,76.287 80.391,78.613 MD1.7
RADIO_TX: MD1.6 R7.1 U1.24 | length 47
  Top Layer w0.254: U1.24 77.703,89.165 77.703,89.939 78.282,90.518 81.465,90.518 89.916,82.067 89.916,77.526 88.971,76.581 81.534,76.581 v1(81.407,76.708) 81.407,78.613 MD1.6
  Bottom Layer w0.254: R7.1 80.624,76.2 81.132,76.708 v1(81.407,76.708)
RESET: MD1.32 P2.6 R9.1 | length 9.5
  Top Layer w0.254: v1(67.564,63.246) 68.834,61.976 68.834,59.309 69.456,58.687 69.456,57.544 P2.6
  Bottom Layer w0.254: v1(67.564,63.246) 67.564,63.315 69.652,65.403 R9.1
RFL: J4.1 MD1.25 | length 6.4
  Top Layer w0.254: J4.1 J4.1@58.928,68.58
  Top Layer w0.293: J4.1 59.309,69.596 60.071,68.834 62.23,68.834 MD1.25
pads on no net: D5.1 J3.4 J3.6 J3.7 J3.8 J3.9 J3.10 J3.11 MD1.4 MD1.5 MD1.15 MD1.16 MD1.17 MD1.18 MD1.19 MD1.29 MD1.35 MD1.36 MD1.40 MD1.42 P2.1 U1.5 U1.10 U1.11 U1.13 U1.14 U1.15 U1.20 U1.21
copper on no net: | length 400
  Top Layer w0.254: 31.496,26.035 131.496,26.035 131.496,126.035 31.496,126.035 31.496,26.035

## Text inside footprints (layer, text, board x,y; h text height)
J3: Mechanical 1 "PCB EDGE" at 54.33,94.632 h0.3 r270